# EAGLE board D-M-005_Fusion360 (EAGLE 9.7.0), part 1 of 2
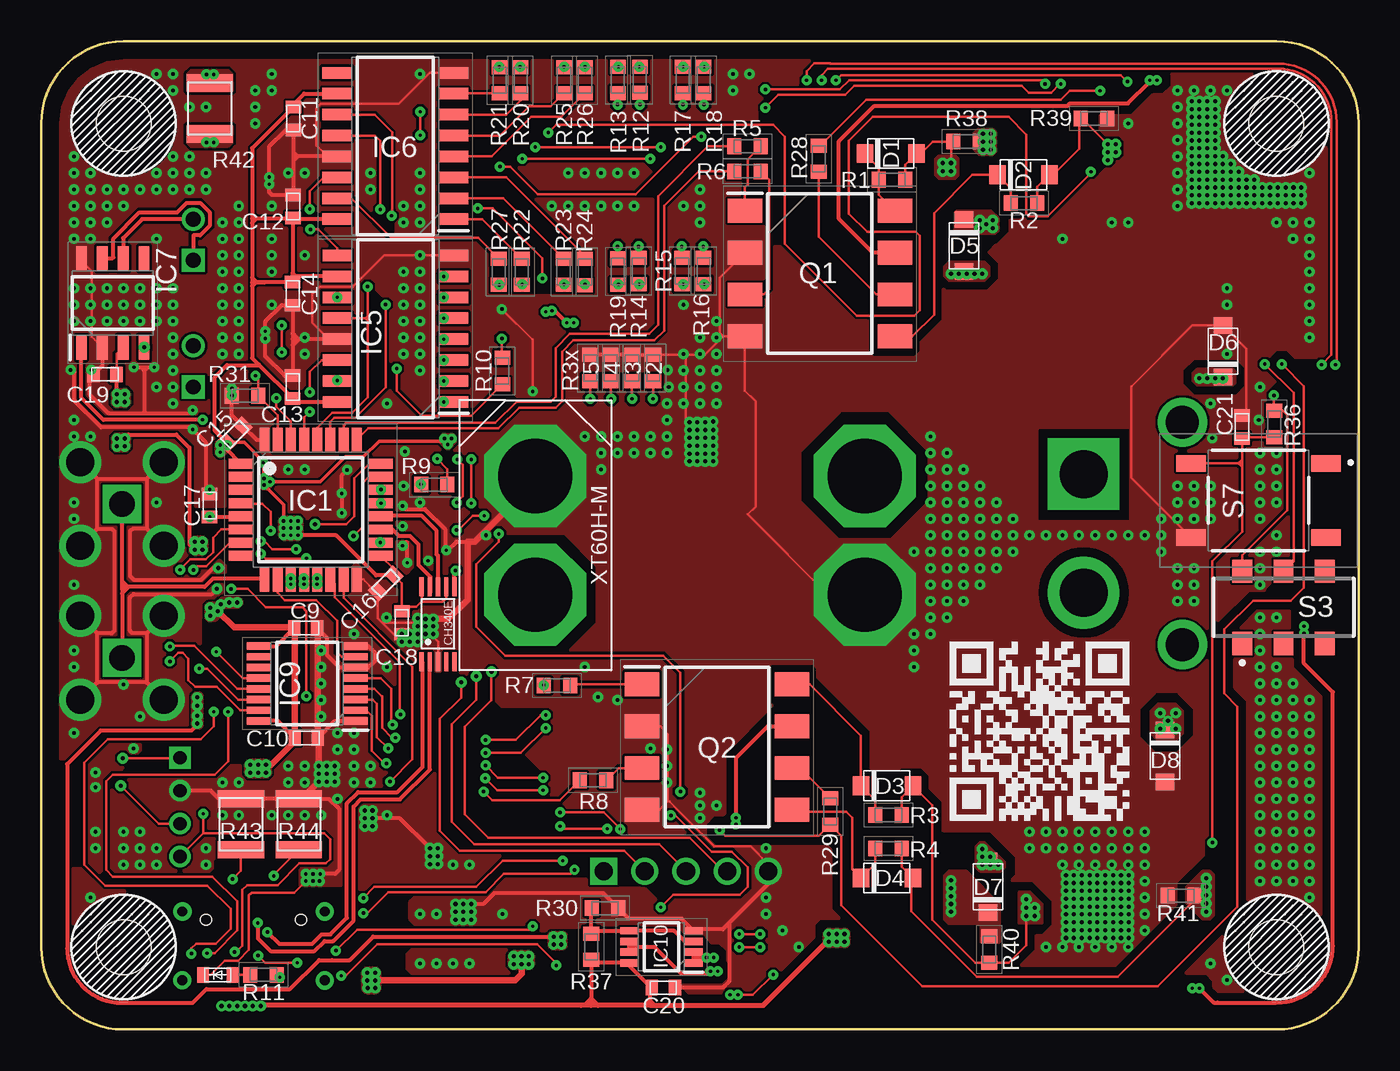
[diagram p0: board, top side]
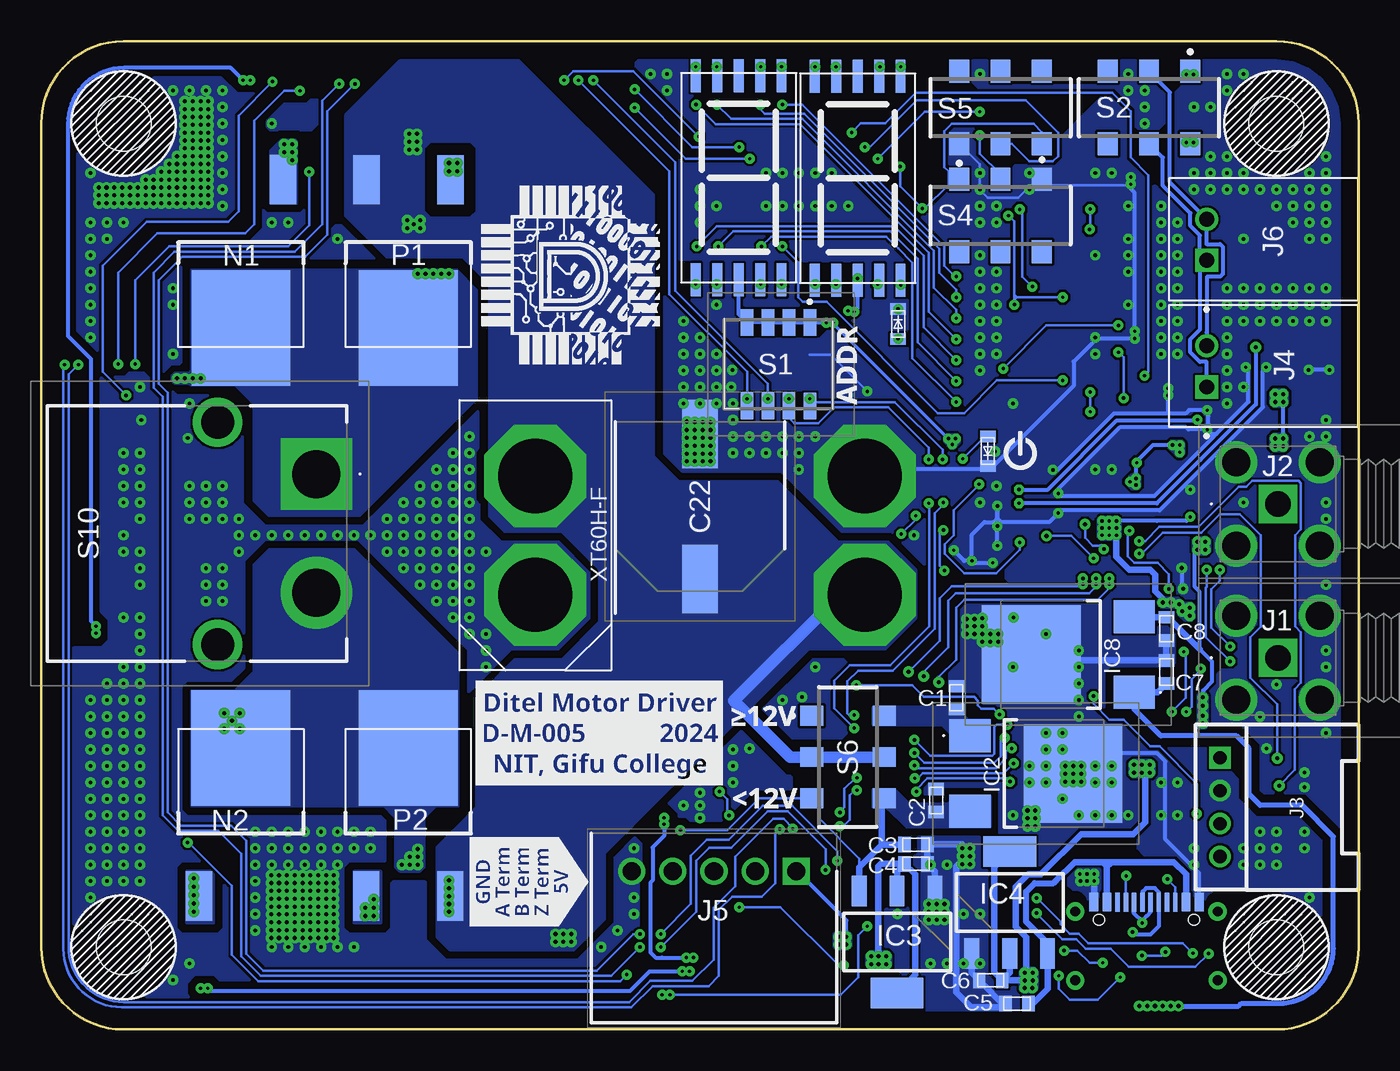
[diagram p1: board, bottom side, seen from below]

Size 80 x 60 mm. Coordinates in mm from the lower left corner, seen from the top.
Outline: 0,55 arc-90 5,60 75,60 arc-90 80,55 80,5 arc-90 75,0 5,0 arc-90 0,5 0,55
Copper layers (1*16): Top / Bottom
Stack-up Default Layer Stack: Top User Defined 0.07mm / Dielectric-1 User Defined 1.5mm / Bottom User Defined 0.07mm
Design rules: minimum copper width 6mil, minimum drill size 0.099mm, copper clearance wire_polygon to wire_polygon 6mil, copper clearance wire_polygon to pad_smd 6mil, copper clearance wire_polygon to via 6mil, copper clearance pad_smd to pad_smd 6mil, copper clearance pad_smd to via 6mil, copper clearance via to via 6mil, copper clearance smd to pad (same net) 6mil, copper clearance smd to via (same net) 6mil, copper clearance smd to smd (same net) 6mil, dimension clearance 40mil, via restrict clearance 0mil, restrict clearance 0mil, drill distance 6mil, keepout clearance 0mil
Holes 3.3 mm at 5,55 5,5 75,55 75,5

## Footprints (pad centres in the part's own frame; a part is rotated, then mirrored left to right if it is on the bottom)
GL9D03M = smd 0.6 x 2: 1 0,-12.42; 2 1.3,-12.42; 3 2.6,-12.42; 4 3.9,-12.42; 5 5.2,-12.42; 6 5.2,-0.02; 7 3.9,-0.02; 8 2.6,-0.02; 9 1.3,-0.02; 10 0,-0.02
CAPC1608X90N = smd 0.75 x 0.94: 1 -0.7,0; 2 0.7,0
CAPAE1030X1080N = smd 4.15 x 2.15: 1 -4.4,0; 2 4.4,0
SODFL3618X110N = smd 1 x 1.13: 1 -1.575,0; 2 1.575,0
LEDC1608X36N = smd 0.7 x 0.95: 1 -0.9,0; 2 0.9,0
QFP80P900X900X160-32N = smd 1.475 x 0.6: 1 -4.238,2.8; 2 -4.238,2; 3 -4.238,1.2; 4 -4.238,0.4; 5 -4.238,-0.4; 6 -4.238,-1.2; 7 -4.238,-2; 8 -4.238,-2.8; 17 4.238,-2.8; 18 4.238,-2; 19 4.238,-1.2; 20 4.238,-0.4; 21 4.238,0.4; 22 4.238,1.2; 23 4.238,2; 24 4.238,2.8 | smd 0.6 x 1.475: 9 -2.8,-4.238; 10 -2,-4.238; 11 -1.2,-4.238; 12 -0.4,-4.238; 13 0.4,-4.238; 14 1.2,-4.238; 15 2,-4.238; 16 2.8,-4.238; 25 2.8,4.238; 26 2,4.238; 27 1.2,4.238; 28 0.4,4.238; 29 -0.4,4.238; 30 -1.2,4.238; 31 -2,4.238; 32 -2.8,4.238
NJM7812SDL1 = smd 2 x 2.5: 1 -2.3,-4.055; 3 2.3,-4.055 | smd 6 x 6: 2 0,2.195
SOT230P700X180-4N = smd 1.85 x 0.9: 1 -3.1,2.3; 2 -3.1,0; 3 -3.1,-2.3 | smd 1.85 x 3.2: 4 3.1,0
SOIC127P780X190-16N = smd 1.775 x 0.7: 1 -3.538,4.445; 2 -3.538,3.175; 3 -3.538,1.905; 4 -3.538,0.635; 5 -3.538,-0.635; 6 -3.538,-1.905; 7 -3.538,-3.175; 8 -3.538,-4.445; 9 3.538,-4.445; 10 3.538,-3.175; 11 3.538,-1.905; 12 3.538,-0.635; 13 3.538,0.635; 14 3.538,1.905; 15 3.538,3.175; 16 3.538,4.445
SOIC127P600X175-8N = smd 1.5 x 0.65: 1 -2.7,1.905; 2 -2.7,0.635; 3 -2.7,-0.635; 4 -2.7,-1.905; 5 2.7,-1.905; 6 2.7,-0.635; 7 2.7,0.635; 8 2.7,1.905
NJM7805SDL1TE1 = smd 2 x 2.5: 1 -2.3,-4.055; 3 2.3,-4.055 | smd 6 x 6: 2 0,2.195
SOP65P640X120-16N = smd 1.475 x 0.45: 1 -2.938,2.275; 2 -2.938,1.625; 3 -2.938,0.975; 4 -2.938,0.325; 5 -2.938,-0.325; 6 -2.938,-0.975; 7 -2.938,-1.625; 8 -2.938,-2.275; 9 2.938,-2.275; 10 2.938,-1.625; 11 2.938,-0.975; 12 2.938,-0.325; 13 2.938,0.325; 14 2.938,0.975; 15 2.938,1.625; 16 2.938,2.275
SOP65P400X100-8N = smd 1.1 x 0.45: 1 -1.95,0.975; 2 -1.95,0.325; 3 -1.95,-0.325; 4 -1.95,-0.975; 5 1.95,-0.975; 6 1.95,-0.325; 7 1.95,0.325; 8 1.95,0.975
CH340E = smd 1.15 x 0.25: CTS# 0,-2; GND 0,-1; RTS# 0,-1.5; RXD 4.55,-0.5; TNOW 4.55,-2; TXD 4.55,-1; UD+ 0,0; UD- 0,-0.5; V3 4.55,0; VCC 4.55,-1.5
S037TGG = drill 1.55 pad 2.325 square: 1 0,0 | drill 1.7 pad 2.55: 2 -2.54,-2.54; 3 2.54,-2.54; 4 2.54,2.54; 5 -2.54,2.54
HW4-2.0-90D = drill 0.8 pad 1.27 square: 1 -3,0 | drill 0.8 pad 1.27: 2 -1,0; 3 1,0; 4 3,0
S2B-XH-A = drill 0.9 square: 1 0,0 | drill 0.9: 2 2.5,0
SHDRRA5W64P0X250_1X5_1490X1150 = drill 1.1 pad 1.65 square: 1 0,0 | drill 1.1 pad 1.65: 2 2.5,0; 3 5,0; 4 7.5,0; 5 10,0
NP52N06SLG-E1-AY = smd 6 x 7: D 0,0.11 | smd 1.6 x 3: G -2.55,-8.89; S 2.55,-8.89
TJ60S04M3L = smd 6 x 7: D 0,0.11 | smd 1.6 x 3: G -2.55,-8.89; S 2.55,-8.89
SOP254P1016X460-8N = smd 2.1 x 1.45: 1 -4.55,3.81; 2 -4.55,1.27; 3 -4.55,-1.27; 4 -4.55,-3.81; 5 4.55,-3.81; 6 4.55,-1.27; 7 4.55,1.27; 8 4.55,3.81
RESC1608X55N = smd 0.85 x 0.95: 1 -0.8,0; 2 0.8,0
RESC3226X70N = smd 1.05 x 2.8: 1 -1.55,0; 2 1.55,0
CHS04TA1 = smd 0.76 x 1.6: 1 -1.905,-2.54; 2 -0.635,-2.54; 3 0.635,-2.54; 4 1.905,-2.54; 5 1.905,2.54; 6 0.635,2.54; 7 -0.635,2.54; 8 -1.905,2.54
SSSS213202 = smd 1.2 x 1.4: 1 -2.5,-2.2; 2 0,-2.2; 3 2.5,-2.2; 4 -2.5,2.2; 5 0,2.2; 6 2.5,2.2
TS06104 = smd 1.8 x 1: A1 4.1,2.25; B1 -4.1,2.25; C1 4.1,-2.25; D1 -4.1,-2.25
XT60H-M = drill 4.5 pad 6.2 octagon: + -3.6,0; - 3.6,0
XT60H-F = drill 4.5 pad 6.2 octagon: + -3.6,0; - 3.6,0
XT60PWM = drill 2.9 pad 4.35 square: 1 0,0 | drill 2.9 pad 4.35: 2 7.2,0 | drill 2 pad 3: MH1 -3.15,-6; MH2 10.35,-6
5077CR-16-SMC2-BK-TR = smd 0.6 x 1.14: A1,B12:GND -3.2,0; A4,B9:VBUS -2.4,0; B1,A12:GND 3.2,0; B4,A9:VBUS 2.4,0 | smd 0.3 x 1.14: A5:CC1 -1.25,0; A6:DP1 -0.25,0; A7:DN1 0.25,0; A8:SBU1 1.25,0; B5:CC2 1.75,0; B6:DP2 0.75,0; B7:DN2 -0.75,0; B8:SBU2 -1.75,0 | drill 0.6 pad 1 slot 1.7 rotated 90: SHEILED1 -4.321,-0.571; SHEILED2 4.32,-0.571 | drill 0.6 pad 1 slot 1.4 rotated 90: SHEILED3 -4.321,-4.751; SHEILED4 4.321,-4.747 | hole 0.65: -2.89,-1.07; 2.89,-1.07

## Placement (x,y rotation side)
7SEG1  GL9D03M  [GL9D03M]  40.25,57.93 0 bottom
7SEG2  GL9D03M  [GL9D03M]  33.03,57.9 0 bottom
C1  GRM188F11H104ZA01D  [CAPC1608X90N]  24.44,20.14 90 bottom
C2  GRM188F11H104ZA01D  [CAPC1608X90N]  25.66,13.89 270 bottom
C3  GRM188F11H104ZA01D  [CAPC1608X90N]  26.88,11.22 180 bottom
C4  GRM188F11H104ZA01D  [CAPC1608X90N]  26.89,10.05 180 bottom
C5  GRM188F11H104ZA01D  [CAPC1608X90N]  20.76,1.56 0 bottom
C6  GRM188F11H104ZA01D  [CAPC1608X90N]  22.35,2.98 0 bottom
C7  GRM188F11H104ZA01D  [CAPC1608X90N]  11.68,21.71 90 bottom
C8  GRM188F11H104ZA01D  [CAPC1608X90N]  11.68,24.32 270 bottom
C9  GRM188F11H104ZA01D  [CAPC1608X90N]  16.06,24.37 180 top
C10  GRM188F11H104ZA01D  [CAPC1608X90N]  16.09,17.69 180 top
C11  GRM188F11H104ZA01D  [CAPC1608X90N]  15.31,55.3 90 top
C12  GRM188F11H104ZA01D  [CAPC1608X90N]  15.3,49.95 270 top
C13  GRM188F11H104ZA01D  [CAPC1608X90N]  15.26,39.01 270 top
C14  GRM188F11H104ZA01D  [CAPC1608X90N]  15.27,44.67 90 top
C15  GRM188F11H104ZA01D  [CAPC1608X90N]  11.76,36.13 225 top
C16  GRM188F11H104ZA01D  [CAPC1608X90N]  20.93,27.08 45 top
C17  GRM188F11H104ZA01D  [CAPC1608X90N]  10.23,31.81 270 top
C18  GRM188F11H104ZA01D  [CAPC1608X90N]  21.9,24.69 90 top
C19  GRM188F11H104ZA01D  [CAPC1608X90N]  3.88,39.78 0 top
C20  GRM188F11H104ZA01D  [CAPC1608X90N]  37.77,2.54 180 top
C21  GRM188F11H104ZA01D  [CAPC1608X90N]  72.91,36.57 270 top
C22  UUD1H221MNL1GS  [CAPAE1030X1080N]  40,31.75 90 bottom
D1  GS1010FL  [SODFL3618X110N]  51.58,53.18 0 top
D2  GS1010FL  [SODFL3618X110N]  59.64,51.89 0 top
D3  GS1010FL  [SODFL3618X110N]  51.34,14.79 0 top
D4  GS1010FL  [SODFL3618X110N]  51.34,9.2 0 top
D5  GS1010FL  [SODFL3618X110N]  56.03,47.59 270 top
D6  GS1010FL  [SODFL3618X110N]  71.75,41.18 90 top
D7  GS1010FL  [SODFL3618X110N]  57.49,8.66 90 top
D8  GS1010FL  [SODFL3618X110N]  68.23,16.6 270 top
DATA_TRANSMISSION_LED  SML-E12P8WT86  [LEDC1608X36N]  10.72,3.31 0 top
IC1  STM32F303K8T6  [QFP80P900X900X160-32N]  16.36,31.55 0 top
IC2  NJM7812SDL1  [NJM7812SDL1]  19.55,15.53 270 bottom
IC3  AZ1117CH-3.3TRG1  [SOT230P700X180-4N]  28.04,5.32 270 bottom
IC4  AZ1117CH-3.3TRG1  [SOT230P700X180-4N]  21.2,7.7 90 bottom
IC5  TC74HC595AF  [SOIC127P780X190-16N]  21.51,42.55 180 top
IC6  TC74HC595AF  [SOIC127P780X190-16N]  21.5,53.64 180 top
IC7  MCP2561T-H_SN  [SOIC127P600X175-8N]  4.35,44.11 90 top
IC8  NJM7805SDL1-TE1  [NJM7805SDL1TE1]  17.7,22.77 90 bottom
IC9  SN74LV166APWR  [SOP65P640X120-16N]  16.15,21 180 top
IC10  NJM2904M-TE1  [SOP65P400X100-8N]  37.65,5.01 180 top
IC11  CH340E  [CH340E]  23.09,22.33 90 top
J1  S-037-TGG  [S037TGG]  4.91,22.56 180 bottom
J2  S-037-TGG  [S037TGG]  4.91,31.91 180 bottom
J3  4P-2.0-90D  [HW4-2.0-90D]  8.42,13.49 270 bottom
J4  S2B-XH-A  [S2B-XH-A]  9.24,39.01 90 bottom
J5  S5B-XH-A_LF__SN_  [SHDRRA5W64P0X250_1X5_1490X1150]  34.15,9.6 180 bottom
J6  S2B-XH-A  [S2B-XH-A]  9.24,46.7 90 bottom
N1  NP52N06SLG-E1-AY  [NP52N06SLG-E1-AY]  67.87,42.7 180 bottom
N2  NP52N06SLG-E1-AY  [NP52N06SLG-E1-AY]  67.88,16.98 0 bottom
P1  TJ60S04M3L  [TJ60S04M3L]  57.71,42.7 180 bottom
P2  TJ60S04M3L  [TJ60S04M3L]  57.72,16.98 0 bottom
POWER_LED  SML-E12P8WT86  [LEDC1608X36N]  22.52,35.11 90 bottom
Q1  TLP621-2SMT_R  [SOP254P1016X460-8N]  47.28,45.89 0 top
Q2  TLP621-2SMT_R  [SOP254P1016X460-8N]  41.03,17.14 0 top
R1  RC0603J100R  [RESC1608X55N]  51.66,51.59 0 top
R2  RC0603J100R  [RESC1608X55N]  59.67,50.17 0 top
R3  RC0603J100R  [RESC1608X55N]  51.43,13.02 180 top
R4  RC0603J100R  [RESC1608X55N]  51.43,10.98 180 top
R5  RC0603J100R  [RESC1608X55N]  42.89,53.62 0 top
R6  RC0603J100R  [RESC1608X55N]  42.89,52.1 0 top
R7  RC0603J100R  [RESC1608X55N]  31.31,20.88 0 top
R8  RC0603J100R  [RESC1608X55N]  33.51,15.12 0 top
R9  RC0603J100R  [RESC1608X55N]  23.87,33.07 0 top
R10  RC0603J100R  [RESC1608X55N]  28,39.97 90 top
R11  RC0603J100R  [RESC1608X55N]  13.51,3.31 180 top
R12  RC0603J120R  [RESC1608X55N]  36.35,57.66 90 top
R13  RC0603J120R  [RESC1608X55N]  35.02,57.65 90 top
R14  RC0603J120R  [RESC1608X55N]  36.28,46.04 270 top
R15  RC0603J120R  [RESC1608X55N]  38.91,46.04 270 top
R16  RC0603J120R  [RESC1608X55N]  40.22,46.04 270 top
R17  RC0603J120R  [RESC1608X55N]  38.95,57.65 90 top
R18  RC0603J120R  [RESC1608X55N]  40.22,57.65 90 top
R19  RC0603J120R  [RESC1608X55N]  35.01,46.02 270 top
R20  RC0603J120R  [RESC1608X55N]  29.11,57.63 90 top
R21  RC0603J120R  [RESC1608X55N]  27.84,57.63 90 top
R22  RC0603J120R  [RESC1608X55N]  29.17,46 270 top
R23  RC0603J120R  [RESC1608X55N]  31.71,46 270 top
R24  RC0603J120R  [RESC1608X55N]  33.02,45.99 270 top
R25  RC0603J120R  [RESC1608X55N]  31.74,57.63 90 top
R26  RC0603J120R  [RESC1608X55N]  33.01,57.63 90 top
R27  RC0603J120R  [RESC1608X55N]  27.79,46 270 top
R28  RC0603J2K  [RESC1608X55N]  47.21,52.86 90 top
R29  RC0603J2K  [RESC1608X55N]  47.9,13.24 270 top
R30  RC0603J10K  [RESC1608X55N]  34.23,7.36 180 top
R31  RC0603J10K  [RESC1608X55N]  12.38,38.48 0 top
R32  RC0603J10K  [RESC1608X55N]  37.16,40.15 270 top
R33  RC0603J10K  [RESC1608X55N]  35.87,40.15 270 top
R34  RC0603J10K  [RESC1608X55N]  34.57,40.15 270 top
R35  RC0603J10K  [RESC1608X55N]  33.33,40.15 270 top
R36  RC0603J10K  [RESC1608X55N]  74.86,36.75 90 top
R37  RC0603J15K  [RESC1608X55N]  33.39,5.02 270 top
R38  RC0603J20K  [RESC1608X55N]  56.19,53.91 0 top
R39  RC0603J20K  [RESC1608X55N]  63.93,55.31 180 top
R40  RC0603J20K  [RESC1608X55N]  57.56,4.85 90 top
R41  RC0603J20K  [RESC1608X55N]  69.21,8.12 0 top
R42  RK73B2ETTD121J  [RESC3226X70N]  10.24,55.91 90 top
R43  RK73B2ETTD512J  [RESC3226X70N]  12.13,12.45 270 top
R44  RK73B2ETTD512J  [RESC3226X70N]  15.65,12.45 270 top
S1  CHS-04TA1  [CHS04TA1]  35.24,40.38 180 bottom
S2  SSSS213202  [SSSS213202]  12.74,55.97 180 bottom
S3  SSSS213202  [SSSS213202]  75.43,25.63 0 top
S4  SSSS213202  [SSSS213202]  21.75,49.42 180 bottom
S5  SSSS213202  [SSSS213202]  21.75,55.97 0 bottom
S6  SSSS213202  [SSSS213202]  31.02,16.54 270 bottom
S7  TS-06104  [TS06104]  73.91,32.12 0 top
S8  XT60H-M  [XT60H-M]  30,30 90 top
S9  XT60H-F  [XT60H-F]  50,30 270 bottom
S10  XT60PW-M  [XT60PWM]  63.29,33.71 270 bottom
U$4  5077CR-16-SMC2-BK-TR  [5077CR-16-SMC2-BK-TR]  12.89,7.73 0 bottom
UART_LED  SML-E12P8WT86  [LEDC1608X36N]  27.97,42.83 270 bottom

## Library data of the parts
7SEG1 7SEG2 = GL9D03M
C1-C21 = GRM188F11H104ZA01D_2; DESCRIPTION: Multilayer Ceramic Capacitors MLCC - SMD/SMT 0603 0.10uF 50volt F +80/-20%; HEIGHT: 0.9mm; MANUFACTURER_NAME: Murata Electronics; MANUFACTURER_PART_NUMBER: GRM188F11H104ZA01D; MOUSER_PART_NUMBER: 81-GRM188F11H104ZA1D; MOUSER_PRICE-STOCK: https://www.mouser.co.uk/ProductDetail/Murata-Electronics/GRM188F11H104ZA01D?qs=f2jQ6kmD2TvlbTQfIom8Rw%3D%3D
C22 = UUD1H221MNL1GS; ARROW_PART_NUMBER: UUD1H221MNL1GS; ARROW_PRICE-STOCK: https://www.arrow.com/en/products/uud1h221mnl1gs/nichicon?region=nac; DESCRIPTION: Al Cap UD series SMT 220uF 50V Nichicon 220uF 50 V Aluminium Electrolytic Capacitor, UD Series 5000h 10 (Dia.) x 10mm; HEIGHT: 10.8mm; MANUFACTURER_NAME: Nichicon; MANUFACTURER_PART_NUMBER: UUD1H221MNL1GS; MOUSER_PART_NUMBER: 647-UUD1H221MNL; MOUSER_PRICE-STOCK: https://www.mouser.co.uk/ProductDetail/Nichicon/UUD1H221MNL1GS?qs=vtpzqDgAobnaECklx3mHVg%3D%3D
D1-D8 = GS1010FL; DESCRIPTION: Surface general purpose rectifier; HEIGHT: 1.1mm; MANUFACTURER_NAME: PANJIT; MANUFACTURER_PART_NUMBER: GS1010FL
DATA_TRANSMISSION_LED POWER_LED UART_LED = SML-E12P8WT86; ARROW_PART_NUMBER: SML-E12P8WT86; ARROW_PRICE-STOCK: https://www.arrow.com/en/products/sml-e12p8wt86/rohm-semiconductor; DESCRIPTION: Standard LEDs - SMD SMD Green 2.5-16 mcd; HEIGHT: 0.36mm; MANUFACTURER_NAME: ROHM Semiconductor; MANUFACTURER_PART_NUMBER: SML-E12P8WT86; MOUSER_PART_NUMBER: 755-SML-E12P8WT86; MOUSER_PRICE-STOCK: https://www.mouser.co.uk/ProductDetail/ROHM-Semiconductor/SML-E12P8WT86?qs=4kLU8WoGk0vBFbk40ZI0Fw%3D%3D
IC1 = STM32F303K8T6; ARROW_PART_NUMBER: STM32F303K8T6; ARROW_PRICE-STOCK: https://www.arrow.com/en/products/stm32f303k8t6/stmicroelectronics; DESCRIPTION: ARM Microcontrollers - MCU 16/32-BITS MICROS; HEIGHT: 1.6mm; MANUFACTURER_NAME: STMicroelectronics; MANUFACTURER_PART_NUMBER: STM32F303K8T6; MOUSER_PART_NUMBER: 511-STM32F303K8T6; MOUSER_PRICE-STOCK: https://www.mouser.co.uk/ProductDetail/STMicroelectronics/STM32F303K8T6?qs=9MuLHSkliconZih9IS1ieg%3D%3D
IC2 = NJM7812SDL1
IC3 IC4 = AZ1117CH-3.3TRG1; ARROW_PART_NUMBER: AZ1117CH-3.3TRG1; ARROW_PRICE-STOCK: https://www.arrow.com/en/products/az1117ch-3.3trg1/diodes-incorporated?region=nac; DESCRIPTION: 1.35A 3.3V LDO Reg. Current Limit SOT223 DiodesZetex AZ1117CH-3.3TRG1, LDO Voltage Regulator, 0.8A, 3.3 V +/-1%, maximum of 15 Vin, 3-Pin SOT-223; HEIGHT: 1.8mm; MANUFACTURER_NAME: Diodes Inc.; MANUFACTURER_PART_NUMBER: AZ1117CH-3.3TRG1; MOUSER_PART_NUMBER: 621-AZ1117CH-3.3TRG1; MOUSER_PRICE-STOCK: https://www.mouser.co.uk/ProductDetail/Diodes-Incorporated/AZ1117CH-3.3TRG1?qs=FKu9oBikfSm7ntaG6olPSQ%3D%3D
IC5 IC6 = TC74HC595AF; DESCRIPTION: Counter Shift Registers 8-Bit Register/Latch Tri-State; HEIGHT: 1.9mm; MANUFACTURER_NAME: Toshiba; MANUFACTURER_PART_NUMBER: TC74HC595AF; MOUSER_PART_NUMBER: 757-TC74HC595AF; MOUSER_PRICE-STOCK: https://www.mouser.co.uk/ProductDetail/Toshiba/TC74HC595AF?qs=YSwmw3WEQ5RcoaYpzlb%252Bfw%3D%3D
IC7 = MCP2561T-H_SN; ARROW_PART_NUMBER: MCP2561T-H/SN; ARROW_PRICE-STOCK: https://www.arrow.com/en/products/mcp2561t-hsn/microchip-technology?region=nac; DESCRIPTION: CAN 1Mbps 5V Automotive 8-Pin SOIC N T/R; HEIGHT: 1.75mm; MANUFACTURER_NAME: Microchip; MANUFACTURER_PART_NUMBER: MCP2561T-H/SN; MOUSER_PART_NUMBER: 579-MCP2561T-H/SN; MOUSER_PRICE-STOCK: https://www.mouser.co.uk/ProductDetail/Microchip-Technology/MCP2561T-H-SN?qs=6qKXPk0vzx30ICTOcV%2F0gw%3D%3D
IC8 = NJM7805SDL1-TE1; DESCRIPTION: Linear Voltage Regulator IC Positive Fixed 1 Output 1.5A TO-252-3; HEIGHT: 2.63mm; MANUFACTURER_NAME: Nisshinbo; MANUFACTURER_PART_NUMBER: NJM7805SDL1-TE1; MOUSER_PART_NUMBER: 513-NJM7805SDL1-TE1; MOUSER_PRICE-STOCK: https://www.mouser.co.uk/ProductDetail/Nisshinbo/NJM7805SDL1-TE1?qs=GBLSl2AkirtxkrsaOjZilw%3D%3D
IC9 = SN74LV166APWR; ARROW_PART_NUMBER: SN74LV166APWR; ARROW_PRICE-STOCK: https://www.arrow.com/en/products/sn74lv166apwr/texas-instruments; DESCRIPTION: 8-Bit Parallel-Load Shift Registers; HEIGHT: 1.2mm; MANUFACTURER_NAME: Texas Instruments; MANUFACTURER_PART_NUMBER: SN74LV166APWR; MOUSER_PART_NUMBER: 595-SN74LV166APWR; MOUSER_PRICE-STOCK: https://www.mouser.co.uk/ProductDetail/Texas-Instruments/SN74LV166APWR?qs=LzFo6vGRJ4t%252BKw5aGzWNzA%3D%3D
IC10 = 1206W4F1200T5E; DESCRIPTION: NJM2904D Series 0.5 V/us Surface Mount Dual Operational Amplifier - DMP-8; HEIGHT: 1mm; MANUFACTURER_NAME: New Japan Radio; MANUFACTURER_PART_NUMBER: NJM2904M-TE1; MOUSER_PART_NUMBER: 513-NJM2904M-TE1; MOUSER_PRICE-STOCK: https://www.mouser.co.uk/ProductDetail/NJR/NJM2904M-TE1?qs=7x5O%252BBkfEwvY2wzmxbVQ3A%3D%3D
IC11 = CH340E
J1 J2 = S-037-TGG; DESCRIPTION: Horizontal SMA connector for board; HEIGHT: 10.3mm; MANUFACTURER_NAME: Cosmtec; MANUFACTURER_PART_NUMBER: S-037-TGG
J3 = OPL_Connector
J4 J6 = Connector; CATEGORY: Headers; DESCRIPTION: Connector Header Through Hole, Right Angle 2 position 0.098" (2.50mm); MANUFACTURER: JST Sales America Inc.; MPN: S2B-XH-A-1(LF)(SN); OPERATING_TEMPERATURE: -25°C ~ 85°C; PART_STATUS: Active; PITCH: 0.098" (2.50mm); ROHS_COMPLIANCE: ROHS3 Compliant; SERIES: XH; SUB-CATEGORY: Rectangular Connectors; TYPE: Header, Male Pin, Board to Cable/Wire, Through Hole
J5 = S5B-XH-A_LF__SN_; ARROW_PART_NUMBER: S5B-XH-A(LF)(SN); ARROW_PRICE-STOCK: https://www.arrow.com/en/products/s5b-xh-a-lf-sn/jst-manufacturing?region=europe; DESCRIPTION: JST XH Series, Series Number S5B, 2.5mm Pitch 5 Way 1 Row Right Angle PCB Header, Solder Termination, 3A; HEIGHT: 6.1mm; MANUFACTURER_NAME: JST (JAPAN SOLDERLESS TERMINALS); MANUFACTURER_PART_NUMBER: S5B-XH-A(LF)(SN)
N1 N2 = NP52N06SLG-E1-AY
P1 P2 = TJ60S04M3L; DESCRIPTION: P-Channel 40 V 60A (Ta) 90W (Tc) Surface Mount DPAK+; HEIGHT: 2.7mm; MANUFACTURER_NAME: Toshiba; MANUFACTURER_PART_NUMBER: TJ60S04M3L
Q1 Q2 = TLP621-2SMT&R; ARROW_PART_NUMBER: TLP621-2SMT&R; ARROW_PRICE-STOCK: https://www.arrow.com/en/products/tlp621-2smtr/isocom; DESCRIPTION: Isocom, TLP621-2SMT&R DC Input NPN Phototransistor Output Dual Optocoupler, Surface Mount, 8-Pin SMD; HEIGHT: 4.6mm; MANUFACTURER_NAME: Isocom; MANUFACTURER_PART_NUMBER: TLP621-2SMT&R
R1-R41 = RC0603JxxxR; DESCRIPTION: displa; HEIGHT: 0.55mm; MANUFACTURER_NAME: Faithful Link; MANUFACTURER_PART_NUMBER: RC0603J100R
R42-R44 = RK73B2ETTDxxxJ
S1 = CHS-04TA1; DESCRIPTION: SWITCH SLIDE DIP SPST 100MA 6V; HEIGHT: 2.5mm; MANUFACTURER_NAME: Copal Electronics; MANUFACTURER_PART_NUMBER: CHS-04TA1
S2-S6 = SSSS213202; DESCRIPTION: Slide Switches 1-pole 2-positions Surface Mount Slide Switch SPDT Maintained 0.3 A Slide; HEIGHT: mm; MANUFACTURER_NAME: ALPS Electric; MANUFACTURER_PART_NUMBER: SSSS213202; MOUSER_PART_NUMBER: 688-SSSS213202; MOUSER_PRICE-STOCK: https://www.mouser.co.uk/ProductDetail/Alps-Alpine/SSSS213202?qs=6EGMNY9ZYDRKFJ9qebDCNQ%3D%3D
S7 = TS-06104; DESCRIPTION: Tactile Switch; HEIGHT: 4.35mm; MANUFACTURER_NAME: Jinbeili; MANUFACTURER_PART_NUMBER: TS-06104
S8 S9 = XT60H
S10 = XT60PW-M; DESCRIPTION: Socket; DC supply; XT60; male; PIN: 2; on PCBs; THT; yellow; 30A; 500V; HEIGHT: 8.4mm; MANUFACTURER_NAME: Changzhou Amass Elec; MANUFACTURER_PART_NUMBER: XT60PW-M
U$4 = FaBo-USB

## Nets
3.3V: 7SEG1.3 7SEG2.3 C4.2 C6.2 C9.2 C10.2 C11.2 C12.2 C13.2 C14.2 C15.2 C16.2 C17.2 C18.2 IC1.1 IC1.5 IC1.17 IC3.2 IC3.4 IC4.2 IC4.4 IC5.10 IC5.16 IC6.10 IC6.16 IC9.9 IC9.16 IC11.V3 IC11.VCC R36.2 S1.1 S1.2 S1.3 S1.4 S3.4 S4.3 S5.3
5V: C8.1 C19.2 IC7.3 IC8.3 J5.1
7SEG_A1: IC5.6 R12.1
7SEG_A2: IC6.6 R20.1
7SEG_B1: IC5.7 R13.1
7SEG_B2: IC6.7 R21.1
7SEG_C1: IC5.1 R14.1
7SEG_C2: IC6.1 R22.1
7SEG_D1: IC5.2 R15.1
7SEG_D2: IC6.2 R23.1
7SEG_DP1: IC5.15 R19.1
7SEG_DP2: IC6.15 R27.1
7SEG_E1: IC5.3 R16.1
7SEG_E2: IC6.3 R24.1
7SEG_F1: IC5.5 R17.1
7SEG_F2: IC6.5 R25.1
7SEG_G1: IC5.4 R18.1
7SEG_G2: IC6.4 R26.1
7SEG_QH': IC5.9 IC6.14
7SEG_RCK: IC1.28 IC5.12 IC6.12
7SEG_SCK: IC1.27 IC5.11 IC6.11
7SEG_SI: IC1.29 IC5.14
ADD_SW1: IC9.2 R32.2 S1.5
ADD_SW2: IC9.3 R33.2 S1.6
ADD_SW3: IC9.4 R34.2 S1.7
ADD_SW4: IC9.5 R35.2 S1.8
BOOT0: IC1.31 R31.2 S3.5
CAN_H: IC7.7 J4.1 J6.1 S2.5
CAN_L: IC7.6 J4.2 J6.2 S2.2
GATE_BASE1: IC10.6 IC10.7 Q1.7
GATE_BASE2: IC10.1 IC10.2 Q2.7
GATE_N1: D2.1 Q1.5 R2.1
GATE_N2: D4.1 Q2.5 R4.2
GATE_P1: D1.1 Q1.8 R1.1
GATE_P2: D3.1 Q2.8 R3.2
GND: C1.2 C2.1 C3.1 C4.1 C5.1 C6.1 C7.2 C8.2 C9.1 C10.1 C11.1 C12.1 C13.1 C14.1 C15.1 C16.1 C17.1 C18.1 C19.1 C20.1 C21.1 C22.2 D6.2 D8.2 DATA_TRANSMISSION_LED.1 IC1.16 IC1.32 IC2.2 IC3.1 IC4.1 IC5.8 IC5.13 IC6.8 IC6.13 IC7.2 IC7.8 IC8.2 IC9.1 IC9.6 IC9.8 IC10.4 IC11.GND J1.2 J1.3 J1.4 J1.5 J2.2 J2.3 J2.4 J2.5 J3.2 J5.5 N1.S N2.S POWER_LED.1 Q1.2 Q1.4 Q2.2 Q2.4 R30.1 R31.1 R32.1 R33.1 R34.1 R35.1 R39.1 R41.1 R43.1 R44.1 S4.1 S5.1 S7.D1 S8.- S9.- U$4.A1,B12:GND U$4.B1,A12:GND UART_LED.1
LED_DATA_TRANSMISSION: IC11.TNOW R11.1
LED_POWER: IC1.18 R9.1
LED_UART: IC1.30 R10.1
MODE_ROTARY_ENCODERS: IC9.14 S4.2
MODE_WITH_ROTARY_ENCODERS: IC9.12 S5.2
N$1: D5.2 D6.1 N1.D P1.D S10.1
N$2: Q2.1 R7.2
N$3: D3.2 P2.G R3.1 R40.1
N$5: D1.2 P1.G R1.2 R38.1
N$6: D4.2 N2.G R4.1 R41.2
N$7: 7SEG1.2 R15.2
N$9: IC10.3 IC10.5 R30.2 R37.1
N$10: R43.2 U$4.B5:CC2
N$11: Q1.6 R28.1
N$12: Q1.1 R5.2
N$14: 7SEG1.1 R16.2
N$15: R42.1 S2.4
N$16: Q2.3 R8.2
N$17: D7.2 D8.1 N2.D P2.D S10.2
N$19: Q1.3 R6.2
N$22: D2.2 N1.G R2.2 R39.2
N$23: C1.1 IC2.1 S6.4
N$27: POWER_LED.2 R9.2
N$28: Q2.6 R29.1
N$32: 7SEG1.9 R17.2
N$33: R10.2 UART_LED.2
N$34: 7SEG1.10 R18.2
N$35: 7SEG1.5 R19.2
N$36: R44.2 U$4.A5:CC1
N$37: 7SEG1.4 R14.2
N$38: 7SEG1.6 R13.2
N$39: 7SEG1.7 R12.2
N$40: 7SEG2.2 R23.2
N$41: 7SEG2.1 R24.2
N$42: 7SEG2.9 R25.2
N$43: 7SEG2.10 R26.2
N$44: 7SEG2.5 R27.2
N$45: 7SEG2.4 R22.2
N$46: 7SEG2.6 R21.2
N$47: 7SEG2.7 R20.2
N$56: R42.2 S2.1
N$61: DATA_TRANSMISSION_LED.2 R11.2
NRST: C21.2 IC1.4 J3.4 R36.1 S7.B1
PC_UART_RXD: IC1.20 IC11.TXD
PC_UART_TXD: IC1.19 IC11.RXD
ROTARY_ENCODER_A: IC1.13 J5.4
ROTARY_ENCODER_B: IC1.12 J5.3
ROTARY_ENCODER_Z: IC1.11 J5.2
RXD: IC1.21 IC7.4
SIG_N1: IC1.26 R5.1
SIG_N2: IC1.14 R7.1
SIG_P1: IC1.25 R6.1
SIG_P2: IC1.15 R8.1
SW_CLK: IC1.10 IC9.7
SW_QH: IC1.6 IC9.13
SW_SH/LD: IC1.7 IC9.15
SWCLK: IC1.24 J3.3
SWDIO: IC1.23 J3.1
TXD: IC1.22 IC7.1
UART_RX: IC1.9 J1.1 J2.1
USB_5V: C5.2 IC4.3 U$4.A4,B9:VBUS U$4.B4,A9:VBUS
USB_D+: IC11.UD+ U$4.A6:DP1 U$4.B6:DP2
USB_D-: IC11.UD- U$4.A7:DN1 U$4.B7:DN2
VCC: C7.1 C20.2 C22.1 D5.1 D7.1 IC8.1 IC10.8 P1.S P2.S R37.2 R38.2 R40.2 S6.2 S6.5 S8.+ S9.+
~12V: C2.2 C3.2 IC2.3 IC3.3 R28.2 R29.2 S6.3 S6.6

## Tracks (layer width: path | path; a pad name or v marks a point on that pad's centre or on a via)
3.3V  (via drill 0.2, 0.2 pad 0.03, 0.25 pad 0.03)
  Top 0.16: C11.2 15.31,56.15 | 15.36,49.19 C12.2 15.27,49.22 | 23.09,25.99 23.09,25.95 24.36,25.95 24.59,26.18 IC11.VCC | 23.09,25.99 IC11.V3 | IC1.17 21.43,27.93 C16.2 21.9,27.1 C18.2 22.17,25.67 22.77,25.67 23.09,25.99 | v26.51,49.84 27.42,49.84 30.44,46.83 v30.44,45.6 | S3.4 72.93,28.8 75.64,31.51 75.64,37.3 75.4,37.55 R36.2 74.85,37.56 v74.85,38.49 | v27.86,52.38 28.49,52.38 30.16,50.72 36.11,50.72 39.6,54.21 v40.08,54.21 | v48.26,57.62 48.57,57.94 65.56,57.94 v65.96,57.54
  Top 0.203: v14.72,30.87 14.72,31.86 v13.53,33.06 v13.53,33.45 13.53,34.37 v13.49,34.41 13.52,34.44 12.32,35.64 C15.2 | v13.89,33.25 16.94,33.25 18.45,34.76 19.56,34.76 20.51,35.72 24.32,35.72 v24.48,35.87
  Top 0.254: v30.63,43.57 31.07,43.57 | 31.07,43.57 31.23,43.57 v31.9,42.9 v32.34,42.9 | IC6.10 15.97,56.81 15.31,56.15 | IC6.16 15.36,49.19 | 15.27,45.91 C14.2 13.57,45.37 | 15.27,45.91 15.27,49.22 13.05,49.22 | IC5.10 15.46,45.72 15.27,45.91 | IC5.16 15.48,38.1 C13.2 13.21,40.37 | IC1.1 11.26,35.22 C15.2 10.55,36.35 10.55,39.6 11.27,40.33 13.21,40.33 13.21,40.37 | C11.2 12.81,53.51 12.81,49.46 | 12.81,49.46 12.81,49.25 | 13.05,49.22 12.84,49.22 12.81,49.25 | 13.06,45.37 13.04,45.37 | 12.81,49.25 12.81,48.97 | 12.81,48.97 12.81,45.64 | 12.81,45.64 12.81,45.36 | 12.81,45.36 12.81,45.12 | 12.81,45.12 12.81,40.76 13.21,40.37 | 13.57,45.37 13.56,45.36 12.81,45.36 | 12.81,45.64 13.08,45.37 | 13.08,45.37 13.57,45.37 | 13.08,45.37 13.06,45.37 | 13.06,45.37 12.81,45.12 | 13.05,49.22 12.81,49.46 | 13.05,49.22 13.05,49.21 12.81,48.97 | C10.2 14.36,18.73 IC9.16 | C9.2 14.27,23.28 IC9.9 | IC1.5 12.08,31.11 C17.2 | C16.2 20.34,27.57 17.91,30 v15.59,30 | v31.01,43.63 31.07,43.57
  Top 0.406: v20.27,2.97 28.77,2.97 29.16,3.37 v29.16,3.96 | v12.7,16.07 13.96,16.07 15.39,17.5 C10.2 15.39,24.34 C9.2 15.36,24.4 11.72,24.4 v10.73,25.4
  Bottom 0.16: S4.3 24.43,51.62 24.91,52.1 | 24.91,52.1 25.16,52.34 25.16,54.53 24.7,54.98 19.75,54.98 19.25,54.48 S5.3 | 24.91,52.1 24.91,51.28 26.35,49.84 v26.51,49.84 27.86,51.19 v27.86,52.38 | v30.44,45.6 7SEG2.3 | v40.08,54.21 44.05,58.18 47.7,58.18 v48.26,57.62 | v65.96,57.54 68.02,55.48 68.02,49.69 68.65,49.05 73.58,49.05 76.27,46.35 76.27,39.92 v74.85,38.49
  Bottom 0.203: v31.9,42.9 31.9,42.86 v24.92,35.87 v24.48,35.87
  Bottom 0.254: 7SEG1.3 37.65,43.43 S1.4 S1.3 S1.2 S1.1 33.31,42.9 v32.34,42.9 v31.9,42.9 | 7SEG2.3 30.43,43.78 v30.63,43.57 30.96,43.57 v31.01,43.63 | v11.31,35.48 12.5,35.48 13.45,34.52 | v13.49,34.41 13.53,34.37 v13.53,33.45 | C17.2 10.47,30.88 12.25,30.88 12.26,30.87 v14.72,30.87
  Bottom 0.406: C6.2 21.2,3.43 IC4.2 | C6.2 22.14,3.47 22.14,9.86 IC4.4 | C6.2 v20.28,2.98 v20.27,2.97 | IC3.2 28.04,9.61 C4.2 | IC3.4 26.94,3.31 26.94,9.41 C4.2 | C4.2 29.03,10.05 29.16,9.92 v29.16,4.44 | v19.8,3.45 | v19.8,3.45 v20.27,3.45 20.2,3.53 20.2,5.59 20.83,6.23 20.83,8.65 20.06,9.42 19.3,9.42 16.86,11.86 13.69,11.86 12.97,12.58 12.97,15.39 v13.17,15.59 | 15.63,29.96 v15.59,30 | v14.72,30 14.72,28.69 13.93,27.9 12.66,27.9 12.35,27.59 12.35,26.61 11.9,26.16 v11.9,25.92 v11.43,25.92
  other vias: 19.8,2.97 28.69,4.44 29.6,4.44 28.69,3.96 29.6,3.96 13.17,16.07 13.65,16.07 12.7,15.59 13.65,15.59 15.16,30.87 15.59,30.87 14.72,30.44 15.16,30.44 15.59,30.44 15.16,30 10.23,31.11 10.87,35.48 10.87,35.04 24.68,35.52 19.82,2.52 10.9,25.8 10.27,25.59 10.27,25.12 20.28,2.51
  pour Bottom (no thermals): 19.44,2.38 19.44,3.57 19.68,3.81 20.39,3.81 20.63,3.57 20.63,2.38 20.39,2.14 19.68,2.14
  pour Top (no thermals): 19.44,3.57 19.68,3.81 20.39,3.81 20.63,3.57 20.63,2.38 20.39,2.14 19.68,2.14 19.44,2.38
  pour Bottom (no thermals): 28.33,3.85 28.33,4.56 28.57,4.8 29.72,4.8 29.96,4.56 29.96,3.85 29.72,3.61 28.57,3.61
  pour Top (no thermals): 28.33,4.56 28.57,4.8 29.72,4.8 29.96,4.56 29.96,3.85 29.72,3.61 28.57,3.61 28.33,3.85
  pour Bottom (no thermals): 12.34,16.19 12.34,15.47 12.58,15.24 13.77,15.24 14,15.47 14,16.19 13.77,16.43 12.58,16.43
  pour Top (no thermals): 12.34,16.19 12.34,15.47 12.58,15.24 13.77,15.24 14,15.47 14,16.19 13.77,16.43 12.58,16.43
  pour Bottom (no thermals): 14.4,30.99 14.4,29.88 14.6,29.68 15.71,29.68 15.91,29.88 15.91,30.99 15.71,31.19 14.6,31.19
  pour Top (no thermals): 14.4,30.99 14.4,29.88 14.6,29.68 15.71,29.68 15.91,29.88 15.91,30.99 15.71,31.19 14.6,31.19
  pour Top (no thermals): 10.04,31.27 10.04,30.99 10.16,30.87 10.31,30.87 10.43,30.99 10.43,31.31 10.08,31.31
  pour Top (no thermals): 10.55,35.64 10.55,34.92 10.75,34.72 11.03,34.72 11.62,35.32 11.62,35.64 11.46,35.79 10.71,35.79
  pour Bottom (no thermals): 10.75,34.72 11.03,34.72 11.62,35.32 11.62,35.6 11.43,35.79 10.71,35.79 10.55,35.64 10.55,34.92
  pour Bottom (no thermals): 13.21,33.57 13.21,32.94 13.41,32.74 13.81,32.74 14.2,33.14 14.2,33.37 13.81,33.77 13.41,33.77
  pour Top (no thermals): 13.21,33.57 13.21,32.94 13.41,32.74 13.81,32.74 14.2,33.14 14.2,33.37 13.81,33.77 13.41,33.77
  pour Top (no thermals): 24.16,35.99 24.16,35.6 24.56,35.2 24.8,35.2 25.24,35.64 25.24,35.99 25.04,36.19 24.36,36.19
  pour Bottom (no thermals): 24.16,35.99 24.16,35.6 24.56,35.2 24.8,35.2 25.24,35.64 25.24,35.99 25.04,36.19 24.36,36.19
  pour Bottom (no thermals): 10.12,24.76 10.63,24.76 11.03,25.16 11.03,25.48 11.11,25.55 12.02,25.55 12.26,25.79 12.26,26.07 12.06,26.27 10.95,26.27 10.63,25.95 10.12,25.95 9.92,25.75 9.92,24.96
  pour Top (no thermals): 10.72,24.85 11.03,25.16 11.03,25.44 11.15,25.55 12.02,25.55 12.26,25.79 12.26,26.07 12.06,26.27 10.95,26.27 10.63,25.95 10.12,25.95 9.92,25.75
  pour Top (no thermals): 9.92,25.75 9.92,24.96 10.12,24.76 10.63,24.76 10.87,25 10.87,25.04 10.04,25.87
5V  (via drill 0.25 pad 0.03)
  Top 0.16: IC7.3 4.58,41.01 C19.2 | v9.48,18.57 9.48,18.49
  Top 0.254: v4.6,38.57 4.58,38.59 C19.2 | v5.08,35.87 5.31,36.11 8.21,36.11 9,35.32 9,29.45 v9.32,29.13 | v9.48,19.05 9.48,18.49 9.12,18.13 3.61,18.13 1.58,16.11 1.58,4.92 arc90 4.88,1.62 9.2,1.62 10.03,2.44 15.1,2.44 16.87,4.21 17.64,4.21 17.65,4.2 18.73,4.2 20.16,5.63 v31.59,5.63
  Bottom 0.254: v4.6,35.87 v4.6,38.1 | J5.1 34.08,9.6 31.11,6.62 v31.11,5.63 | 31.67,5.63 v31.59,5.63 | v9.48,20.16 9.46,20.18 9.46,20.57 8.93,21.11 8.93,22.34 9.66,23.07 9.66,26.57 9.96,26.87 9.96,28.97 v9.8,29.13
  Bottom 0.406: IC8.3 13.6,25.02 C8.1 11.66,25 11.58,25 10.04,23.45 9.66,23.07
  other vias: 5.08,38.1 5.08,38.57 4.6,35.4 5.08,35.4 9.48,19.64 9.32,29.6 31.11,5.16 31.59,5.16 9.8,29.6
  pour Top (no thermals): 4.24,38.69 4.24,37.98 4.48,37.74 5.19,37.74 5.43,37.98 5.43,38.69 5.19,38.93 4.48,38.93
  pour Top (no thermals): 4.24,35.99 4.24,35.28 4.48,35.04 5.19,35.04 5.43,35.28 5.43,35.99 5.19,36.23 4.48,36.23
  pour Bottom (no thermals): 4.24,38.69 4.24,37.98 4.48,37.74 5.19,37.74 5.43,37.98 5.43,38.69 5.19,38.93 4.48,38.93
  pour Bottom (no thermals): 4.24,35.28 4.48,35.04 5.19,35.04 5.43,35.28 5.43,35.99 5.19,36.23 4.48,36.23 4.24,35.99
  pour Bottom (no thermals): 9.12,20.32 9.12,18.37 9.28,18.21 9.68,18.21 9.84,18.37 9.84,20.36 9.68,20.51 9.32,20.51
  pour Bottom (no thermals): 8.96,29.72 8.96,29.01 9.2,28.77 9.92,28.77 10.16,29.01 10.16,29.72 9.92,29.96 9.2,29.96
  pour Top (no thermals): 9.12,20.32 9.12,18.37 9.28,18.21 9.68,18.21 9.84,18.37 9.84,20.36 9.68,20.51 9.32,20.51
  pour Top (no thermals): 8.96,29.01 9.2,28.77 9.92,28.77 10.16,29.01 10.16,29.72 9.92,29.96 9.2,29.96 8.96,29.72
  pour Bottom (no thermals): 30.75,5.79 30.75,5.04 30.99,4.8 31.74,4.8 31.94,5 31.94,5.83 31.82,5.95 30.91,5.95
  pour Top (no thermals): 30.75,5.79 30.75,5.04 30.99,4.8 31.74,4.8 31.94,5 31.94,5.83 31.82,5.95 30.91,5.95
7SEG_A1  (via drill 0.2 pad 0.03)
  Top 0.16: IC5.6 v24.44,44.45 | R12.1 v36.35,56.15
  Bottom 0.16: v24.44,44.45 24.44,44.92 25.47,45.95 25.47,47.39 33.67,55.59 36.06,55.59 36.35,55.88 v36.35,56.15
7SEG_A2
  Top 0.16: IC6.6 28.23,55.54 29.11,56.41 R20.1
7SEG_B1  (via drill 0.2 pad 0.03)
  Top 0.16: IC5.7 v24.44,45.72 | v35,56.15 35,56.83 R13.1
  Bottom 0.16: v24.44,45.72 24.52,45.72 25.16,46.35 25.16,47.52 33.79,56.15 v35,56.15
7SEG_B2
  Top 0.16: R21.1 25.05,56.83
  Top 0.254: 25.05,56.83 IC6.7
7SEG_C1  (via drill 0.2 pad 0.03)
  Top 0.16: IC5.1 v24.45,38.1 v24.44,38.1 | R14.1 36.27,46.85 v36.27,47.54
  Bottom 0.16: v24.44,38.1 27.1,40.76 27.1,46.55 27.98,47.42 28.69,48.14 35.67,48.14 v36.27,47.54
7SEG_C2
  Top 0.16: IC6.1 26.78,49.19 R22.1
7SEG_D1  (via drill 0.2 pad 0.03)
  Top 0.16: IC5.2 v24.45,39.37 v24.44,39.37 | R15.1 38.89,46.86 v38.89,47.54
  Bottom 0.16: v24.44,39.37 26.78,41.71 26.78,46.79 28.45,48.45 37.98,48.45 v38.89,47.54
7SEG_D2
  Top 0.16: IC6.2 28.05,50.46 R23.1
7SEG_DP1  (via drill 0.2 pad 0.03)
  Top 0.16: IC5.15 v17.97,39.4 v17.97,39.41 | R19.1 35,46.84 v35,47.54
  Bottom 0.16: v17.97,39.41 21.98,39.41 23.97,37.42 25.56,37.42 32.31,44.17 33.77,44.17 34.05,44.45 34.05,46.59 v35,47.54
7SEG_DP2
  Top 0.16: R27.1 26.53,48.06 21.24,48.06 18.84,50.46 IC6.15
7SEG_E1  (via drill 0.2 pad 0.03)
  Top 0.16: IC5.3 v24.45,40.64 v24.44,40.64 | R16.1 40.2,46.86 v40.2,47.54
  Bottom 0.16: v24.44,40.64 26.43,42.62 26.43,46.99 28.21,48.77 38.97,48.77 v40.2,47.54
7SEG_E2
  Top 0.16: R24.1 33.02,46.95 28.24,51.73 IC6.3
7SEG_F1  (via drill 0.2 pad 0.03)
  Top 0.16: IC5.5 v24.45,43.18 v24.44,43.18 | R17.1 38.97,56.84 v38.97,56.15
  Bottom 0.16: v38.97,56.15 38.09,55.28 33.8,55.28 25.8,47.27 25.8,45.04 24.44,43.69 v24.44,43.18
7SEG_F2
  Top 0.16: IC6.5 27.86,54.27 29.62,56.03 30.95,56.03 R25.1
7SEG_G1  (via drill 0.2 pad 0.03)
  Top 0.16: IC5.4 v24.45,41.91 v24.44,41.91 | R18.1 40.24,56.84 v40.24,56.15
  Bottom 0.16: v40.24,56.15 39.05,54.96 33.93,54.96 26.11,47.14 26.11,43.57 v24.44,41.91
7SEG_G2
  Top 0.16: R26.1 31.59,55.4 29.76,55.4 27.36,53 IC6.4
7SEG_QH'  (via drill 0.2 pad 0.03)
  Top 0.16: IC5.9 17.97,47.43 16.82,48.57 v16.35,48.57 | v16.31,49.8 16.31,50.88 17.15,51.73 IC6.14
  Bottom 0.16: v16.31,49.8 16.31,48.61 v16.35,48.57
7SEG_RCK  (via drill 0.2 pad 0.03)
  Top 0.16: IC6.12 20.25,54.27 20.58,53.94 v20.58,49.79 | 19.82,43.31 v19.82,45.1 | 19.82,43.31 19.68,43.18 | IC5.12 19.68,43.18 | 19.82,43.05 19.82,43.31 | 19.68,43.18 19.82,43.05 | IC1.28 16.76,36.52 16.76,36.53 17.68,37.45 18.88,37.45 19.82,38.38 19.82,43.05
  Bottom 0.16: v19.82,45.1 20.42,45.71 20.42,49.63 v20.58,49.79
7SEG_SCK  (via drill 0.2 pad 0.03)
  Top 0.16: IC6.11 20.24,55.54 21.31,54.47 21.31,49.44 v21.27,49.4 | IC1.27 17.56,36.89 17.81,37.13 19.07,37.13 20.91,38.98 v20.91,44.01
  Bottom 0.16: IC5.11 20.73,44.45 | 20.93,44.64 20.93,44.45 | 20.93,44.45 20.93,44.26 | 20.93,44.26 20.93,44.02 v20.91,44.01 | 20.73,44.45 20.93,44.64 | 20.73,44.45 20.93,44.26 | 20.73,44.45 20.92,44.45 20.93,44.45 | 20.93,44.64 20.93,46.42 20.92,46.42 20.92,49.05 v21.27,49.4
  other vias: 17.97,44.45
7SEG_SI  (via drill 0.2 pad 0.03)
  Top 0.16: IC5.14 17.02,40.64 16.31,39.92 v16.31,38.69 | IC1.29 15.96,37.16 v16.31,37.5
  Bottom 0.16: v16.31,37.5 v16.31,38.69
ADD_SW1  (via drill 0.2, 0.2 pad 0.03)
  Top 0.16: R32.2 37.16,38.31 v37.14,38.3 | v20.96,16.15 20.83,16.15 20.06,16.92 20.06,19.05 19.73,19.38 IC9.2 | v47.38,57.62 47.38,57.94 47.77,58.33 75.1,58.33 arc-90 78.34,55.09 78.34,40.95 v77.74,40.36 | v34.36,12.18 31.67,12.18 v31.51,12.34 | v30.48,14.52 27.7,14.52 v26.96,15.26
  Bottom 0.16: v37.14,38.3 S1.5 37.14,39.92 41.87,44.64 41.87,52.11 v47.38,57.62 | v20.96,16.15 21.55,15.55 26.47,15.55 26.77,15.26 v26.96,15.26 | v77.74,40.36 78.34,39.76 78.34,5.02 arc-90 74.98,1.66 44.3,1.66 43.01,2.95 40.46,2.95 39.16,4.24 39.16,7.39 37.86,8.69 37.86,10.47 35.55,12.78 34.92,12.78 34.36,12.22 v34.36,12.18 | v31.51,12.34 31.31,12.34 30.91,12.74 30.91,14.2 30.6,14.52 v30.48,14.52
ADD_SW2  (via drill 0.2, 0.2 pad 0.03)
  Top 0.16: R33.2 v35.87,38.3 | IC9.3 20.13,20.03 20.38,19.77 20.38,17.75 v21.07,17.06 | v46.47,57.62 46.47,58.18 46.94,58.64 47.91,58.64 75.1,58.64 arc-90 78.66,55.09 78.66,40.44 v78.58,40.36 | v31.51,13.17 34.17,13.17 35.16,12.18 v35.16,12.16 | v30.48,15.28 27.73,15.28 v26.98,16.03
  Bottom 0.16: v35.87,38.3 S1.6 35.87,39.21 41.51,44.84 41.51,52.66 v46.47,57.62 | v78.58,40.36 78.66,40.28 78.66,4.9 arc-90 75.1,1.35 44.17,1.35 42.88,2.64 39.46,2.64 38.85,3.25 38.85,7.26 38.04,8.07 36.25,8.07 35.44,8.88 35.44,11.9 35.17,12.16 v35.16,12.16 | v31.51,13.17 31.51,13.21 31.23,13.49 31.23,14.6 30.55,15.28 v30.48,15.28 | v21.07,17.06 21.23,17.06 21.43,16.86 21.43,16.46 22.02,15.87 26.82,15.87 v26.98,16.03
ADD_SW3  (via drill 0.2, 0.2 pad 0.03)
  Top 0.16: R34.2 34.57,38.33 v34.6,38.3 | IC9.4 20.23,20.68 20.68,20.23 20.69,20.22 20.69,18.31 21.29,17.71 v21.51,17.71 | v26.11,34.6 v26.11,31.95 | v26.98,16.79 29.13,16.79 v30.63,18.29
  Bottom 0.16: v34.6,38.3 S1.7 34.6,37.14 34.27,36.81 32.83,36.81 31.86,37.78 28.57,37.78 26.11,35.32 v26.11,34.6 | v21.51,17.71 21.65,17.71 21.74,17.62 21.74,16.59 22.14,16.19 26.38,16.19 v26.98,16.79 | v26.11,31.95 26.07,31.91 26.07,24.48 28.45,22.1 30.91,22.1 31.85,21.16 31.85,19.51 v30.63,18.29
ADD_SW4  (via drill 0.2, 0.2 pad 0.03)
  Top 0.16: R35.2 v33.33,38.3 | IC9.5 20.61,21.33 21.27,20.67 21.27,18.56 v21.33,18.5 | v25.24,31.98 25.24,32.02 25.59,32.38 25.59,34.29 v25.28,34.6 | v26.98,17.58 28.81,17.58 30.32,19.09 v30.63,19.09
  Bottom 0.16: v33.33,38.3 S1.8 33.08,38.09 28.17,38.09 25.28,35.2 v25.28,34.6 | v21.33,18.5 21.97,18.5 22.13,18.35 22.13,16.74 22.26,16.6 26.01,16.6 v26.98,17.58 | v25.24,31.98 25.24,31.86 25.75,31.35 25.76,31.35 25.76,24.32 28.29,21.79 30.39,21.79 31.05,21.13 31.05,19.18 30.95,19.09 v30.63,19.09
BOOT0  (via drill 0.2, 0.2 pad 0.03)
  Top 0.16: IC1.31 14.36,37.3 R31.2 13.18,39.51 v13.01,39.68 | S3.5 76.04,28.44 76.04,38.65 v74.29,40.4 | v30.79,54.45 31.27,54.92 44.45,54.92 45.16,54.21 45.16,47.7 49.52,43.34 53.02,43.34 53.34,43.65 53.34,48.18 53.1,48.41 50.16,48.41 49.04,49.53 49.04,53.96 50.48,55.4 58.73,55.4 59.8,54.33 59.8,49.53 59.97,49.37 61.11,49.37 63.73,51.99 v63.73,52.07
  Bottom 0.16: v13.01,39.68 12.77,39.92 12.77,51.87 13.85,52.94 13.85,55.76 14.96,56.87 26.9,56.87 28.76,55 30.24,55 v30.79,54.45 | v74.29,40.4 74.29,45.48 72.23,47.54 65,47.54 63.73,48.81 v63.73,52.07
CAN_H
  Top 0.254: J6.1 9.24,48.21 9.65,48.21 10.22,48.79 10.22,49.6 9.65,50.18 8.83,50.18 8.26,49.61 5.97,49.61 4.38,48.01 4.38,46.88 4.31,46.81 IC7.7
  Bottom 0.254: J4.1 9.24,40.52 9.65,40.52 10.22,41.1 10.22,41.91 9.64,42.5 9.64,46.3 J6.1 9.64,47.1 9.64,48.21 9.65,48.21 10.22,48.79 10.22,49.55 11.9,51.23 11.9,52.93 S2.5
CAN_L
  Top 0.254: IC7.6 4.98,48.04 6.13,49.2 J6.2
  Bottom 0.254: S2.2 11.46,56.89 11.46,51.42 J6.2 9.24,47.69 8.43,47.69 8.25,47.52 8.25,45.88 8.42,45.71 9.2,45.71 9.23,45.68 9.23,42.33 9.24,42.32 J4.2
GATE_BASE1  (via drill 0.2 pad 0.03)
  Top 0.254: IC10.7 35.7,5 | 35.7,5 IC10.6 | v41.07,3.53 v40.63,3.53 40.52,3.41 38.84,3.41 37.25,5 35.7,5 | v69.89,2.5 v70.32,2.5 71.19,1.62 71.43,1.62 74.99,1.62 arc90 78.42,5.05 78.42,20.48 76.67,22.22 v76.67,24.05 v76.67,24.48 | Q1.7 50.5,47.16 48.43,49.23 48.43,53.91 50.59,56.07 62.32,56.07 62.46,56.22 65.98,56.22 67.31,57.54 v67.31,57.62 v67.74,57.62
  Bottom 0.254: v40.63,3.53 v41.07,3.53 43.06,3.53 44.25,2.34 69.73,2.34 v69.89,2.5 v70.32,2.5 | v76.67,24.05 v76.67,24.48 76.99,24.8 76.99,40.72 78.38,42.11 78.38,54.99 arc90 74.99,58.38 68.5,58.38 v67.74,57.62 v67.31,57.62
GATE_BASE2  (via drill 0.2 pad 0.03)
  Top 0.254: 39.6,4.4 IC10.1 | IC10.2 39.6,4.4 | 39.6,4.4 39.64,4.36 v40.4,4.36 40.79,4.36 | v42.18,12.46 v42.18,12.86 42.18,16.47 44.13,18.41 Q2.7
  Bottom 0.254: v40.83,4.36 v40.4,4.36 42.3,4.36 42.7,4.36 43.02,4.68 43.02,8.9 42.87,9.05 42.87,11.05 42.18,11.74 v42.18,12.46 v42.18,12.86
GATE_N1
  Top 0.16: R2.1 58.87,51.08 D2.1 56.53,51.89 54.21,49.57 54.21,43.39 52.9,42.08 Q1.5
GATE_N2
  Top 0.16: R4.2 50.63,10.07 D4.1 49.25,9.73 49.25,12.86 48.89,13.21 45.7,13.21 Q2.5
GATE_P1
  Top 0.16: D1.1 50.86,52.32 R1.1 50.86,50.66 Q1.8
GATE_P2
  Top 0.16: R3.2 50.63,13.93 D3.1 49.77,17.84 46.66,20.95 Q2.8
GND  (via drill 0.2 pad 0.03, 0.22, 0.25 pad 0.03)
  Top 0.16: 15.31,52.86 15.45,53 | C13.1 | Q2.4 37.54,13.33 38.05,13.85 | 38.05,13.85 38.05,17.94 37.58,18.41 Q2.2 | Q1.4 42.73,38.78 43.37,38.14 43.37,31.75 42.9,31.27 47.77,26.4 S9.- | Q1.4 41.81,42.08 | 41.19,42.06 41.19,42.29 | 41.19,42.29 41.19,45.62 Q1.2 | R32.1 38.95,40.95 | 38.95,40.95 39.14,40.95 | 39.14,40.95 39.33,40.95 | 39.33,40.95 40.28,40.95 41.19,41.87 | 41.19,41.87 41.19,42.06 | Q1.4 41.4,42.08 | 41.4,42.08 41.21,42.08 41.19,42.06 | 41.19,41.87 41.4,42.08 | 41.4,42.08 41.19,42.29 | IC1.16 19.54,27.32 20.28,26.58 C16.1 20.44,24.97 20.72,24.69 | 20.72,24.69 21.41,23.99 C18.1 23.63,23.99 24.09,23.52 IC11.GND | IC7.8 2.44,46.68 3.08,46.05 3.08,42.04 IC7.2 | DATA_TRANSMISSION_LED.1 10.29,3.31 11.15,4.17 11.96,4.17 12.62,4.82 12.62,8.13 12.77,8.29 15.35,8.29 v16.07,9 | IC6.13 17.39,53 16.7,53.69 16.7,55.92 16.98,56.19 21.7,56.19 23.59,58.08 IC6.8 | J5.5 44.15,10.03 43.07,11.11 40.87,11.11 38.13,13.85 38.05,13.85 | UART_LED.1 29.84,41.87 v29.84,38.73 | C10.1 16.86,17.62 | IC5.8 20.84,46.99 18.93,45.08 16.9,45.08 16.46,44.64 16.46,42.9 17.45,41.91 IC5.13 | 20.72,24.69 22.65,24.69 v22.86,24.48 | v39.37,36.87 39.14,37.09 39.14,40.95 | 39.33,40.95 39.14,40.77 38.95,40.95 | C21.1 73.18,37.54 73.18,41.32 D6.2 69.9,42.75 66.17,39.03 66.17,33.51 S7.D1
  Top 0.254: J2.4 6.42,30.4 | 6.42,30.4 5.55,30.4 5.39,30.24 5.39,27.54 5.63,27.3 9.72,27.3 10.43,28.02 v10.75,28.02 | J2.3 6.42,33.42 | 6.42,33.42 6.42,33.41 6.42,30.4 | J2.2 3.4,33.42 | 3.4,33.42 6.42,33.42 | J2.5 3.4,30.39 | 3.4,30.39 3.4,33.42 | 3.4,30.39 4.28,30.39 4.44,30.24 4.44,24.21 4.28,24.05 3.42,24.05 | 3.42,24.05 J1.2 | J1.5 3.42,21.07 | 3.42,21.07 3.42,24.05 | J1.4 6.4,21.07 | 6.4,21.07 3.42,21.07 | J1.3 6.4,24.05 | 6.4,24.05 6.4,21.07 | 6.4,24.05 5.54,24.05 5.39,24.21 5.39,26.23 5.59,26.43 10.35,26.43 v10.67,26.75 | IC7.2 3.71,40.31 C19.1 | C19.1 2.93,39.53 2.93,38.57 4.08,37.42 6.27,37.42 | v18.25,31.35 v18.25,32.54 18.25,33.65 v18.57,33.97 | v5.63,40.2 6.07,40.2 | 6.07,40.2 6.46,40.2 | 6.46,40.2 v6.86,40.2 | 6.07,40.2 6.27,40 | 6.27,40 6.27,37.42 | 6.27,40 6.46,40.2 | v1.78,40.04 1.9,40.04 2.02,39.92 2.02,38.18 3.65,36.55 9.08,36.55 v9.2,36.43 10,35.64 10,32.75 C17.1 | C19.1 3.18,39.91 v3.05,40.04 | S8.- 30,33.3 | 24.68,29.09 24.52,29.25 24.52,30.36 23.29,31.59 22.14,31.59 v21.94,31.79 | v22.22,28.33 22.22,29.56 22.14,29.56 v21.94,29.36 | 15.31,53.26 C11.1 14.83,54.6 13.85,53.61 v13.85,51.75 v13.85,51.31 13.85,50.84 14.03,50.66 C12.1 15.31,50.66 15.31,52.75 | 15.31,53.26 15.31,52.86 15.31,52.75 | IC6.13 15.56,53 | 15.45,53 15.56,53 | 15.27,42.26 C14.1 14.59,43.97 13.61,42.98 v13.61,42.38 v13.61,41.95 13.61,40.88 14.78,39.71 C13.1 | 15.27,42.26 15.27,41.91 | 15.27,41.91 15.27,41.55 | 15.27,41.55 C13.1 | IC5.13 15.63,41.91 | 15.62,41.91 15.42,41.91 15.27,41.91 | 15.31,53.26 15.56,53 | 15.31,52.75 15.56,53 | 15.27,42.26 15.62,41.91 | 15.62,41.91 15.63,41.91 | 15.63,41.91 15.27,41.55 | IC1.32 13.09,35.79 C15.1 11.58,37.3 R31.1
  Top 0.254: R32.1 R33.1 R34.1 R35.1 | J5.5 44.15,8.83 41.79,6.46 | 41.79,6.46 41.39,6.07 39.68,6.07 IC10.4 38.87,6.73 35.66,6.73 R30.1 34.1,8.29 27.54,8.29 26.86,7.62 v26.11,7.62 | 41.79,6.46 41.79,2.93 41.39,2.54 C20.1 | R44.1 R43.1 10.79,14 10.3,14.49 J3.2 | v16.94,9.44 17.85,9.44 18.09,9.68 18.09,13.39 17.47,14 R44.1 | R44.1 15.83,14 | C10.1 17.83,18.73 IC9.1 | C9.1 17.34,23.79 17.34,22.73 18.1,21.98 IC9.6 19.12,21.94 19.84,21.94 20.27,22.38 20.27,22.86 19.86,23.28 IC9.8 | 6.27,37.42 9.03,37.42 v9.2,37.59 | v23.61,10.99 21.78,12.82 v20.12,12.82 | 24.68,29.09 25.22,29.62 25.89,29.62 | 24.68,29.09 v24.6,29.09
  Top 0.406: 30,33.3 26.33,29.62 25.89,29.62 25.89,26.09 24.72,24.92 v23.81,24.92 | 15.83,14 v16.86,15.04 | C9.1 16.79,24.34 C10.1 | v16.86,15.99 16.86,17.62 | 24.05,11.03 v24.09,10.99
  Bottom 0.16: 14.13,51.26 18.9,51.26 S4.1 19.52,51.62 20.66,50.48 22.54,50.48 23.01,50.95 23.01,52.53 S5.1 | 14.11,51.26 13.89,51.26 v13.85,51.31 | 14.13,51.26 13.85,51.55 | 13.85,51 14.11,51.26 | 14.11,51.26 14.13,51.26 | v29.84,38.73 32.06,40.95 R35.1 | POWER_LED.1 22.38,34.07 22.32,34.07
  Bottom 0.254: 11.7,37.38 10.51,37.38 10.3,37.59 9.48,37.59 9.46,37.58 v9.2,37.58 | 11.7,37.38 14.88,37.38 18.29,33.97 v18.57,33.97 | v9.2,36.43 10.35,36.43 10.47,36.55 14.52,36.55 18.25,32.82 v18.25,32.54 18.09,32.38 12.42,32.38 8.93,35.87 | 8.65,36.15 6.7,38.1 6.7,40.16 | 8.65,36.15 8.93,35.87 | 8.45,35.16 10.47,33.13 | 10.47,33.13 12.1,31.51 18.09,31.51 v18.25,31.35 18.81,30.79 21.7,30.79 | v5.63,40.2 5.83,40 5.83,37.78 8.16,35.45 | 8.16,35.45 8.16,35.16 | J2.3 8.16,35.16 | 8.16,35.16 8.45,35.16 | 8.45,35.16 8.16,35.45 | v1.78,40.04 v3.05,40.04 | v23.49,28.45 23.37,28.33 v22.22,28.33 | v21.94,29.36 v21.94,30.56 | v21.94,30.56 v21.94,31.79 21.94,31.03 | v21.94,30.56 21.7,30.79 | 21.94,31.03 21.7,30.79 | v23.49,28.45 23.49,30.04 22.74,30.79 22.18,30.79 | 22.18,30.79 21.7,30.79 | v21.94,30.56 22.18,30.79 | 21.94,31.03 22.18,30.79 | S8.- 29.59,34.01 22.38,34.01 22.32,34.07 17.32,39.07 17.32,40.54 15.91,41.95 v13.61,41.95 v13.61,42.38 13.65,42.42 13.65,50.84 13.85,51.03 v13.85,51.31 13.85,51.55 v13.85,51.75 | U$4.B1,A12:GND 9.69,9.5 11.74,11.55 11.74,16.27 12.24,16.76 16.13,16.76 IC2.2 | v9.2,37.58 v9.2,37.59 | v9.2,36.43 8.93,36.15 | 8.93,36.15 8.65,36.15 | 8.93,36.15 8.93,35.87 | v10.75,28.02 10.75,26.82 v10.67,26.75 | 11.7,37.38 11.58,37.5 v11.58,38.49 v11.58,38.93 | 10.47,33.13 10.47,33.02 v10.23,32.78 | IC3.1 25.74,7.72 v25.63,7.62 | v23.49,28.45 23.96,28.45 v24.6,29.09 | v9.2,36.43 9.2,36.7 9.14,36.77 9.14,37.25 9.2,37.32 v9.2,37.58
  Bottom 0.406: 21.46,1.39 C6.1 23.5,3.43 IC4.1 | IC3.1 25.74,9.6 C4.1 26.19,11.21 C3.1 24.09,11.23 v24.09,10.99 v24.09,10.51 v24.09,10.04 24.32,10.04 24.44,9.92 24.44,2.26 23.52,1.34 21.52,1.34 21.46,1.39 | U$4.A1,B12:GND 16.07,7.75 v16.07,9 | C8.2 C7.2 19.53,22.41 IC8.2 | v17.82,15.04 17.85,15 17.85,15.04 IC2.2 | 21.46,1.39 C5.1
  other vias: 71.27,54.92 71.27,54.45 71.27,53.97 71.27,53.5 71.27,53.02 71.27,52.54 71.27,52.07 71.27,51.59 71.27,51.11 71.27,50.64 71.75,53.02 71.75,52.54 72.23,52.54 71.75,52.07 72.23,52.07 71.75,51.59 72.23,51.59 71.75,51.11 72.23,51.11 71.75,50.64 72.23,50.64 72.7,50.64 72.7,51.11 72.7,51.59 72.7,52.07 73.18,51.59 73.18,51.11 73.18,50.64 73.66,51.59 73.66,51.11 73.66,50.64 74.13,51.11 74.13,50.64 74.61,50.64 74.61,51.11 75.08,51.11 75.08,50.64 71.27,55.4 75.56,51.11 75.56,50.64 76.04,51.11 76.04,50.64 71.27,55.88 71.27,56.35 70.8,56.35 70.8,55.88 70.8,55.4 70.8,54.92 70.8,54.45 70.8,53.97 70.8,53.5 70.8,53.02 70.8,52.54 70.8,52.07 70.8,51.59 70.8,51.11 70.8,50.64 76.04,50.16 75.56,50.16 75.08,50.16 74.61,50.16 74.13,50.16 73.66,50.16 73.18,50.16 72.7,50.16 72.23,50.16 71.75,50.16 71.27,50.16 70.8,50.16 70.32,50.16 70.32,50.64 70.32,51.11 70.32,51.59 70.32,52.07 70.32,52.54 70.32,53.02 70.32,53.5 70.32,53.97 70.32,54.45 70.32,54.92 70.32,55.4 70.32,55.88 70.32,56.35 76.51,51.11 76.51,50.64 76.51,50.16 69.84,50.16 69.84,50.64 69.84,51.11 69.84,51.59 69.84,52.07 69.84,52.54 69.84,53.02 69.84,53.5 69.84,53.97 69.84,54.45 69.84,54.92 69.84,55.4 69.84,55.88 69.84,56.35 66.03,9.36 65.56,9.36 65.08,9.36 64.61,9.36 64.13,9.36 66.03,8.89 66.03,8.41 66.03,7.93 66.03,7.46 66.03,6.98 66.03,6.5 66.03,6.03 66.03,5.55 63.65,9.36 63.18,9.36 62.7,9.36 65.56,8.89 65.08,8.89 64.61,8.89 64.13,8.89 63.65,8.89 63.18,8.89 62.7,8.89 62.7,8.41 63.18,8.41 63.65,8.41 64.13,8.41 64.61,8.41 65.08,8.41 65.56,8.41 65.56,7.93 65.08,7.93 64.61,7.93 64.13,7.93 63.65,7.93 63.18,7.93 62.7,7.93 65.56,7.46 65.08,7.46 62.23,9.36 62.23,8.89 62.23,8.41 62.23,7.93 62.23,7.46 62.23,6.98 62.23,6.5 62.23,6.03 62.23,5.55 62.7,5.55 63.18,5.55 63.65,5.55 64.13,5.55 64.61,5.55 65.08,5.55 65.56,5.55 65.56,6.03 65.08,6.03 64.61,6.03 64.13,6.03 63.65,6.03 63.18,6.03 62.7,6.03 62.7,6.5 63.18,6.5 63.65,6.5 64.13,6.5 64.61,6.5 65.08,6.5 65.56,6.5 65.56,6.98 65.08,6.98 64.61,6.98 64.61,7.46 64.13,7.46 64.13,6.98 63.65,6.98 63.65,7.46 63.18,7.46 63.18,6.98 62.7,6.98 62.7,7.46 39.37,34.48 39.84,34.48 40.32,34.48 40.79,34.48 39.37,34.96 39.84,34.96 40.32,34.96 40.79,34.96 40.32,35.44 40.79,35.44 39.84,35.44 39.37,35.44 39.37,35.91 39.84,35.91 40.32,35.91 40.79,35.91 40.79,36.39 40.32,36.39 39.84,36.39 39.37,36.39 39.84,36.87 40.32,36.87 40.79,36.91 16.07,9.44 16.5,9.44 16.5,9.01 16.9,9.01 17.34,15.51 17.34,15.99 17.34,15.04 17.81,15.51 17.81,15.99 16.86,15.51 23.61,10.04 23.61,10.51 27.97,43.73 22.86,24.01 23.33,24.01 22.86,23.53 22.86,24.96 23.81,24.01 23.81,24.48 25.16,7.14 25.63,7.14 26.11,7.14 25.16,7.62 23.33,24.48 23.33,24.92 22.38,23.53 22.38,24.01 21.9,23.53 21.9,24.01 19.64,13.29 20.12,13.29 20.12,12.34 19.64,12.82 19.64,12.34 25.16,6.66 25.63,6.66 26.11,6.66 2,53 2,52 2,51 3,51 3,52 4,51 5,51 6,51 7,51 8,51 8,53 7,52 8,52 9,51 9,52 9,53 10,52 10,51 7,58 8,58 8,57 9,56 10,56 13,56 13,57 13,55 14,57 14,58 16,52 15,52 14,50 14,48 14,47 14,46 16,47 20,51 20,52 23,50 23,49 22,49 22,50 23,51 23,52 23,47 23,46 22,46 22,45 23,45 23,44 22,44 22,42 22,43 23,43 23,42 23,41 22,41 23,40 16,42 16,41 2,50 3,50 4,50 5,50 2,49 3,49 4,49 2,48 3,48 2,45 2,45 3,45 4,45 5,45 6,45 7,45 7,48 8,45 2,44 3,44 4,44 6,44 5,44 7,44 8,44 8,43 7,43 6,43 5,43 4,43 3,43 2,43 2,37 12,50 12,49 11,49 11,48 11,47 12,48 12,47 12,46 12,45 11,45 11,46 11,44 11,43 11,42 11,41 12,41 12,42 11,43 12,43 12,44 14,44 7,39 8,39 8,41 8,40 8,42 8,38 3,36 2,36 2,32 2,31 7,32 2,27 2,23 2,22 6,19 2,18 5,20.94 6,12 5,12 5,11 6,11 7,11 5,10 6,10 7,10 3,8 3.3,11 3.3,12 5.6,17.05 3.3,14.7 3.3,15.6 10,11 10,10 11,13 12,13 11,15 12,15 17,23 17,22 17,21 17,20 14,13 15,13 15,15 16,16 16,15 16,13 17,13 18,14 19,15 19,16 20,15 20,16 15,16 18,17 19,17 19,18 18,18 17,19 21,22 19,24 20.96,25 21,13 25,10 26,10 23,7 24,7 25,4 26,4 27,30 22.08,35.08 23,32 22,33 15,34 16,34 23,58 21,38 28,7 35,20 33.81,20.19 33,22 33,36 34,36 34,35 34,34 35,35 35,36 36,36 39,44 36,35 37,36 37,35 38,36 38,35 38,37 38,38 38.1,39 38.04,40.04 39,41 40,42 41,43 41,42 41,41 41,41 40,41 39,40 39,39 39,38 40,38 40,39 40,40 41,40 41,39 41,38 40,49 40,50 40,51 39,50 36,50 35,50 34,50 33,50 32,50 31,50 36,52 35,52 34,52 33,52 32,52 42,58 43,58 42,57 41,13.6 40,12.84 40,13.6 40,14.37 37,17.06 38,17 38,16 38,15 44,8 44,7 44,11 45,6 46,5 66,55 65,49 66,49 62,48 69,57 72,57 71,57 70,57 69,56 69,55 69,54 69,53 69,52 69,51 69,50 77,52 77,49 76,49 75,49 76,48 77,48 77,47 77,46 77,45 77,44 77,43 77,42 72,45 72,44 72,41 74,39 73.92,37 74,35 75,35 74,34 75,34 75,33 74,33 74,32 75,32 74,31 75,30 75,29 74,29 74,28 74,27 74,25 75,25 74,24 74,23 74,22 75,22 76,21 77,20 76,20 75,20 74,20 74,21 75,21 74,19 75,19 76,19 77,19 77,18 76,18 75,18 74,18 74,17 74,16 74,9 75,9 76,9 77,9 77,8 77,10 76,10 75,10 74,10 74,11 75,11 76,11 77,11 77,17 76,17 75,17 74,15 74,14 74,13 74,12 75,12 76,12 77,12 77,13 77,14 77,15 77,16 76,16 75,16 75,15 75,14 75,13 76,13 76,14 76,15 71,4 72,3 61,5 62,10 63,10 64,10 65,10 66,10 67,10 67,9 67,7 67,8 67,6 60,11 61,11 63,11 62,11 60,12 61,12 62,12 63,12 64,12 64,11 65,11 65,12 66,12 66,11 67,11 67,12 62,5 63,5 64,5 65,5 66,5 71.1,35.9 71,38 69,33 70,33 71,33 71,32 69,32 70,32 68,31 69,31 70,31 71,31 68,30 68,29 69,28 70,28 69,27 70,27 69,26 70,26 66,30 67,30 65,30 64,30 63,30 62,30 61,30 60,30 54,36 54,35 54,34 54,33 54,32 54,31 54,30 53,22 53,23 53,24 54,24 54,25 55,25 54,26 55,26 56,26 54,27 55,27 56,27 57,27 54,28 54,29 53,29 55,28 55,29 55,30 56,31 55,31 55,32 56,33 55,33 56,28 57,28 58,28 59,29 58,29 57,29 56,29 56,30 57,30 58,30 59,30 59,31 58,31 57,31 56,32 57,32 58,32 57,33 55,34 55,35 56,34 24,4 23,4
  pour Bottom (no thermals): 69.37,56.83 71.75,56.83 71.75,54.77 arc90 74.77,51.75 76.99,51.75 76.99,49.69 69.37,49.69
  pour Bottom (no thermals): 61.75,9.84 61.75,5.08 66.51,5.08 66.51,9.84
  pour Top (no thermals): 71.75,56.83 71.75,54.77 arc90 74.77,51.75 76.99,51.75 76.99,42.54 75.4,40.95 65.08,40.95 60.32,36.19 60.32,23.97 66.67,17.62 66.67,5.08 61.75,5.08 61.75,7.77 46.6,22.92 38.98,22.92 31.59,30.32 28.57,30.32 26.66,32.22 26.66,34.92 29.2,37.46 42.06,37.46 45.08,40.48 53.18,40.48 66.47,53.77
  pour Top (no thermals): 68.89,15.39 66.35,17.94 66.35,5.08 66.83,5.08 68.89,7.14
  pour Top (no thermals): 60.32,36.67 65.88,36.67 70.16,40.95 70.16,41.27 64.92,41.27
  pour Top (no thermals): 65.8,53.1 69.53,56.83 71.75,56.83 71.75,52.86 66.03,52.86